# Altium PCB M26_T_V1.0.1.PcbDoc
Units mm, origin at the board's own origin, x right, y up, seen from the top; angles counter-clockwise.
Board outline 152.4 x 101.6 mm, 2 copper layers (Top Layer, Bottom Layer); 71 components, 71 nets, 276 pads, 47 vias.
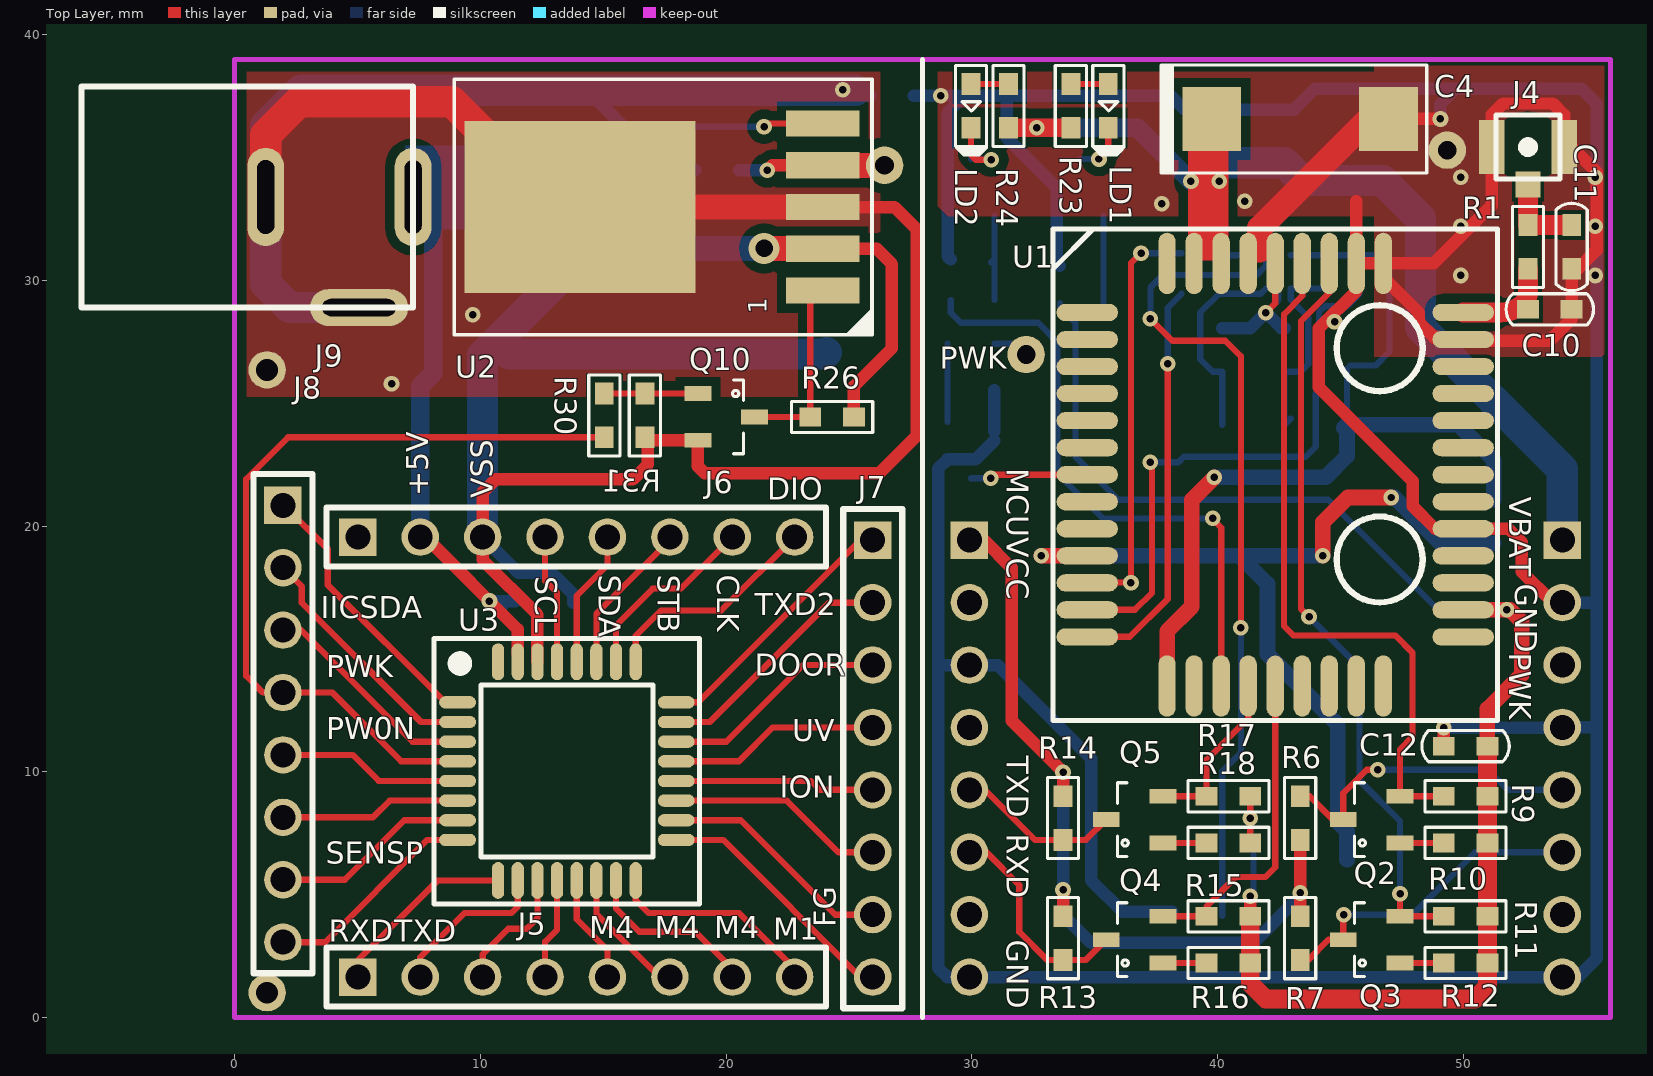
[diagram p0: Top Layer view]
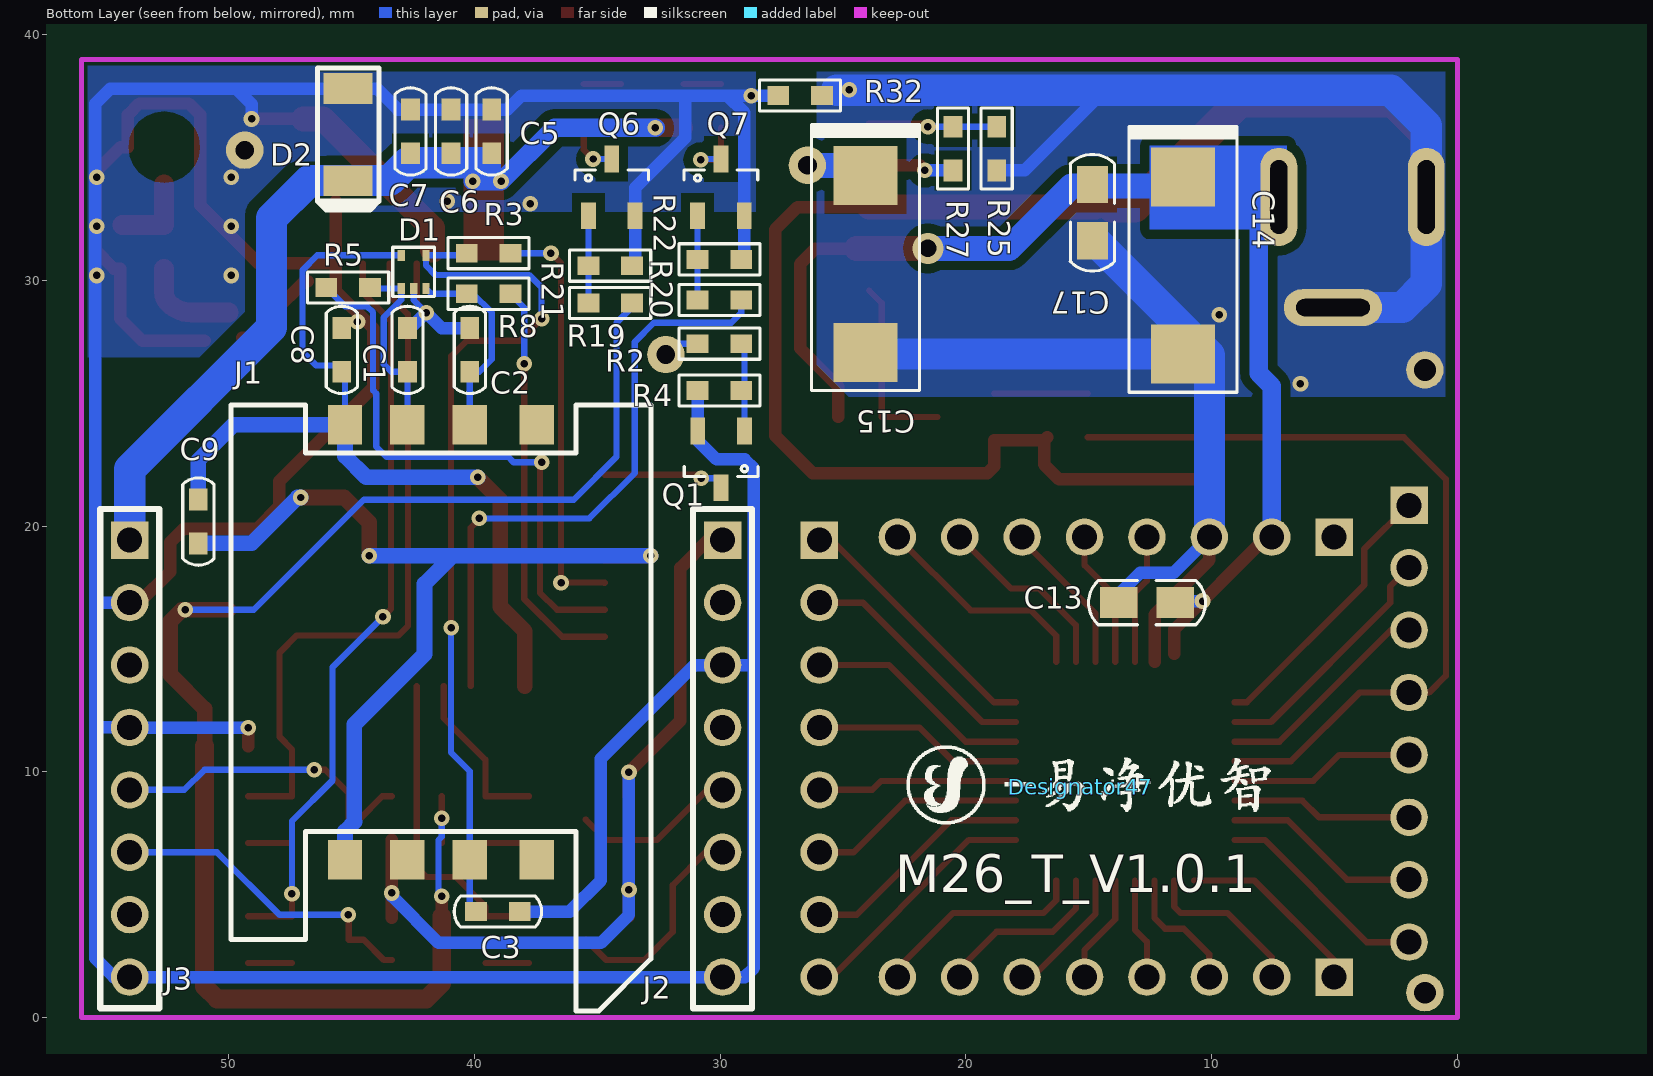
[diagram p1: Bottom Layer view, seen from below]

## Layer stack, top to bottom
Top Layer: signal copper 0.0356
Dielectric: dielectric 0.32, FR-4, Dk 4.8
Bottom Layer: signal copper 0.0356

## Board outline
-38.929,-36.83 113.471,-36.83 113.471,64.77 -38.929,64.77

## Design rules (kind name [scope] priority, off if disabled: settings)
Clearance [All] p1: gap=0.15
ComponentClearance [All] p1: gap=0.254 collisioncheckmode=3 verticalgap=0.254
PlaneClearance [All] p1: clearance=0.15
PlaneConnect [All] p1: planeconnectstyle=Relief reliefexpansion=0.508 reliefentries=4 reliefconductorwidth=0.508 reliefairgap=0.254
PolygonConnect [All] p1: connectstyle=Direct reliefconductorwidth=0.254 reliefentries=4 polygonreliefangle="90 Angle"
RoutingCorners [All] p1: cornerstyle=Round minsetback=10 maxsetback=10
RoutingVias [All] p1: holewidth=0.711 width=1.27 viastyle="Through Hole" minholewidth=0.305 minwidth=0.635 maxholewidth=1.27 maxwidth=1.27
SolderMaskExpansion [All] p1: expansion=0.102
TestPointUsage [All] p1: valid=0 allowmultiple=FALSE
Testpoint [All] p1: side=15 testpointundercomponent=TRUE minsize=1.016 maxsize=2.54 preferedsize=1.524 minholesize=0 maxholesize=1.016 preferedholesize=0.813 testpointgrid=0.025 style=1021 order=0123456789
Width [All] p1: maxlimit=2.54 minlimit=0.254 preferedwidth=0.254 minimp=50.000000 maximp=50.000000 favimp=50.000000
15 further rules are at their usual default settings.

## Classes and differential pairs
component class M26_T_V1.0: C1 C2 C3 C4 C5 C6 C7 C8 C9 C10 C11 C12 D1 D2 J1 J2 J3 J4 J? LD1 LD2 Q1 Q2 Q3 Q4 Q5 Q6 Q7 R1 R2 R3 R4 R5 R6 R7 R8 R9 R10 R11 R12 R13 R14 R15 R16 R17 R18 R19 R20 R21 R22 R23 R24 U1
component class M26_T_V1.0b: C13 C14 C15 C17 J5 J6 J7 J8 J9 Q10 R25 R26 R27 R30 R31 R32 U2 U3

## Components (designator, comment, footprint, x,y, rotation, side; value= is the part's Value field where it differs from the comment)
C1 "33PF" 0603_C 42.732,28.067 r270 bottom
C2 "33PF" 0603_C 40.192,28.067 r270 bottom
C3 "33PF" 0603_C 38.16,4.318 r0 bottom
C4 "470uF/16V" C_TAN_D 43.367,36.576 r0 top
C5 "0.1uF" 0603_C 39.303,36.957 r270 bottom
C6 "33P" 0603_C 40.954,36.957 r270 bottom
C7 "10P" 0603_C 42.605,36.957 r270 bottom
C8 "33PF" 0603_C 45.399,28.067 r270 bottom
C9 "0.1uF" 0603_C 51.241,21.082 r270 bottom
C10 "?" 0603_C 52.638,28.829 r0 top
C11 "?" 0603_C 54.416,32.258 r270 top
C12 "4.7uF" 0603_C 50.987,11.049 r180 top
C13 "0.1uF" 0805_C 13.776,16.891 r180 bottom
C14 "220uF/16V" C_TAN_D 11.169,30.607 r270 bottom
C15 "220uF/16V" C_TAN_D 24.085,30.673 r270 bottom
C17 "0.1uF" 0805_C 14.852,33.909 r270 bottom
D1 "ESDA6V8AV5" SOT-553 42.478,30.353 r90 bottom
D2 "BZV55C4V3" SOD-80 45.145,35.941 r270 bottom
Designator47 "Comment" PIC_AIRFACTORY-1500 15.351,9.398 r180 bottom
J1 "SIM_Card" SIM-8 45.272,24.13 r180 bottom
J2 "CON8" SIP-8 29.905,19.431 r270 bottom
J3 "CON8" SIP-8 54.035,19.431 r270 bottom
J4 "CON2" RF-Z 52.638,35.433 r0 top
J5 "CON8" SIP-8 5.013,1.651 r0 top
J6 "CON8" SIP-8 5.013,19.558 r0 top
J7 "CON8" SIP-8 25.968,19.431 r270 top
J8 "CON8" SIP-8 1.965,20.853 r270 top
J9 "POWER-5V" DC_5 1.263,33.401 r270 top
LD1 "WHITE" LED_0603 35.559,37.995 r270 top
LD2 "WHITE" LED_0603 29.971,37.995 r270 top
Q1 "2N3904" SOT23 29.016,23.876 r270 bottom
Q2 "BSS138" SOT23 47.431,7.112 r180 top
Q3 "BSS138" SOT23 47.431,2.225 r180 top
Q4 "BSS138" SOT23 37.779,2.225 r180 top
Q5 "BSS138" SOT23 37.779,7.112 r180 top
Q6 "2N3904" SOT23 35.366,32.639 r90 bottom
Q7 "2N3904" SOT23 30.921,32.639 r90 bottom
Q10 "2N3904" SOT23 18.856,25.4 r0 top
R1 "0R" 0603_R 52.638,30.48 r90 top
R2 "4.7K" 0603_R 30.921,27.432 r180 bottom
R3 "22R" 0603_R 40.319,31.115 r180 bottom
R4 "47K" 0603_R 29.143,25.527 r0 bottom
R5 "22R" 0603_R 44.256,29.718 r0 bottom
R6 "10K" 0603_R 43.367,7.234 r90 top
R7 "10K" 0603_R 43.367,4.125 r270 top
R8 "22R" 0603_R 40.319,29.464 r180 bottom
R9 "10K" 0603_R 50.987,9.012 r180 top
R10 "10K" 0603_R 50.987,7.112 r180 top
R11 "10K" 0603_R 50.987,4.125 r180 top
R12 "10K" 0603_R 50.987,2.225 r180 top
R13 "10K" 0603_R 33.715,4.125 r270 top
R14 "10K" 0603_R 33.715,9.012 r270 top
R15 "10K" 0603_R 41.335,4.125 r180 top
R16 "10K" 0603_R 41.335,2.225 r180 top
R17 "10K" 0603_R 41.335,9.012 r180 top
R18 "10K" 0603_R 41.335,7.112 r180 top
R19 "4.7K" 0603_R 33.588,29.083 r0 bottom
R20 "4.7K" 0603_R 29.143,29.21 r0 bottom
R21 "47K" 0603_R 35.366,30.607 r180 bottom
R22 "47K" 0603_R 30.921,30.861 r180 bottom
R23 "1K" 0603_R 34.035,36.217 r90 top
R24 "1K" 0603_R 31.495,36.217 r90 top
R25 "56K" 0603_R 18.751,36.261 r270 bottom
R26 "51K" 0603_R 25.206,24.45 r180 top
R27 "124K" 0603_R 20.529,36.261 r270 bottom
R30 "4.7K" 0603_R 15.046,23.622 r90 top
R31 "47K" 0603_R 16.697,25.4 r270 top
R32 "0R" 0603_R 25.863,37.531 r0 bottom
U1 "M26" M26 42.351,22.098 r0 top
U2 "MIC29302" TO-263-5 23.936,29.591 r90 top
U3 "OB39R32T1W32VP" LQFP32 13.522,10.033 r270 top

## Footprints (in the part's own frame and the unit in brackets; to place one, negate y for a bottom-side part, rotate by r counter-clockwise, add the part's x,y. Pads: shape width x height; smd on the part's side, far side on the other; paste and mask are expansions set on the pad)
0603_C [mil]
  rect 35x30 smd: 1(0,0) 2(70,0)
  silkscreen extent -35,-25 105,25, body extent 5,-15 65,15, height 39
0603_R [mil]
  rect 35x30 smd: 1(0,0) 2(70,0)
  silkscreen extent -30,-25 100,25, body extent 5,-15 65,15, height 39
0805_C [mil]
  rect 60x50 smd: 1(0,0) 2(90,0)
  silkscreen extent -48,-35 139,35
C_TAN_D [mm]
  rect 2.4x2.6 smd: 1(-3.6,0) 2(3.6,0)
  silkscreen extent -5.67,-2.2 5.15,2.2, body extent -3.67,-2.2 3.53,2.2, height 4.3
DC_5 [mm]
  oval 4x1.5 hole 0.7 slot 3 at 0 deg: 1(0,0) 3(0,6)
  oval 1.5x4 hole 0.7 slot 3 at 90 deg: 2(4.5,3.8)
  silkscreen extent -4.5,-7.5 4.5,6
LED_0603 [mil]
  rect 35x30 smd: A(0,0) K(70,0)
  silkscreen extent -30,-25 114,25
LQFP32 [mm]
  oval 0.5x1.5 smd: 1(-2.8,-4.45) 2(-2,-4.45) 3(-1.2,-4.45) 4(-0.4,-4.45) 5(0.4,-4.45) 6(1.2,-4.45) 7(2,-4.45) 8(2.8,-4.45) 17(2.8,4.45) 18(2,4.45) 19(1.2,4.45) 20(0.4,4.45) 21(-0.4,4.45) 22(-1.2,4.45) 23(-2,4.45) 24(-2.8,4.45)
  oval 1.5x0.5 smd: 9(4.45,-2.8) 10(4.45,-2) 11(4.45,-1.2) 12(4.45,-0.4) 13(4.45,0.4) 14(4.45,1.2) 15(4.45,2) 16(4.45,2.8) 25(-4.45,2.8) 26(-4.45,2) 27(-4.45,1.2) 28(-4.45,0.4) 29(-4.45,-0.4) 30(-4.45,-1.2) 31(-4.45,-2) 32(-4.45,-2.8)
  silkscreen extent -5.4,-5.4 5.4,5.4
M26 [mm]
  oval 2.5x0.7 smd: 1(-7.65,6.6) 2(-7.65,5.5) 3(-7.65,4.4) 4(-7.65,3.3) 5(-7.65,2.2) 6(-7.65,1.1) 7(-7.65,0) 8(-7.65,-1.1) 9(-7.65,-2.2) 10(-7.65,-3.3) 11(-7.65,-4.4) 12(-7.65,-5.5) 13(-7.65,-6.6) 23(7.65,-6.6) 24(7.65,-5.5) 25(7.65,-4.4) 26(7.65,-3.3) 27(7.65,-2.2) 28(7.65,-1.1) 29(7.65,0) 30(7.65,1.1) 31(7.65,2.2) 32(7.65,3.3) 33(7.65,4.4) 34(7.65,5.5) 35(7.65,6.6)
  oval 0.7x2.5 smd: 14(-4.4,-8.6) 15(-3.3,-8.6) 16(-2.2,-8.6) 17(-1.1,-8.6) 18(0,-8.611) 19(1.1,-8.6) 20(2.2,-8.6) 21(3.3,-8.6) 22(4.4,-8.6) 36(4.4,8.6) 37(3.3,8.6) 38(2.2,8.6) 39(1.1,8.6) 40(0,8.6) 41(-1.1,8.6) 42(-2.2,8.6) 43(-3.3,8.6) 44(-4.4,8.6)
  silkscreen extent -9.05,-10 9.05,10
PIC_AIRFACTORY-1500 [mm]
  silkscreen extent -7.06,-1.52 7.75,1.65
RF-Z [mm]
  rect 1x1.05 smd: 1(0,-1.525)
  rect 1.05x2.2 smd: 2(-1.475,0) 2(1.475,0)
  silkscreen extent -1.3,-1.3 1.3,1.3
SIM-8 [mm]
  rect 1.4x1.6 smd: 1(0,0) 2(2.54,0) 3(5.08,0) 4(7.8,0) 5(0,-17.7) 6(2.54,-17.7) 7(5.08,-17.7) 8(7.8,-17.7)
  silkscreen extent -4.65,-23.85 12.45,0.8
SIP-8 [mil]
  rect 60x60 hole 40: 1(0,0)
  round 60 hole 40: 2(100,0) 3(200,0) 4(300,0) 5(400,0) 6(500,0) 7(600,0) 8(700,0)
  silkscreen extent -50,-47 750,47
SOD-80 [mm]
  rect 1.25x2 smd: 1(-1.875,0) 2(1.875,0)
  silkscreen extent -2.7,-1.25 3.08,1.25
SOT23 [mm]
  rect 1.092x0.6 smd: 1(0,0) 2(0,-1.9) 3(2.308,-0.95)
  silkscreen extent 1.41,-2.45 1.85,0.55, body extent 0.45,-2.45 1.85,0.55, height 1.1
SOT-553 [mm]
  rect 0.45x0.3 smd: 1(-0.675,0.5) 2(-0.675,0) 3(-0.675,-0.5) 4(0.675,-0.5) 5(0.675,0.5)
  silkscreen extent -1,-0.85 1,0.85
TO-263-5 [mm]
  rect 1.07x3 smd: 1(0,0) 2(1.7,0) 3(3.4,0) 4(5.1,0) 5(6.8,0)
  rect 7x9.4 smd: 6(3.41,9.878)
  silkscreen extent -1.8,-2 8.6,15, body extent 0,0 6.8,12.6, height 4.5

## Part data
C1 C2 C3 C8 C9 C10 C11 C12 C17: library part CAP, "CAP"
C4 C14 C15: library part ECAP, "E-CAP"
C5 C6 C7 C13: library part "Cap Semi", "Capacitor"
D2: library part "DIODE SCHOTTKY"
LD1 LD2: library part LED, "LED"
Q1 Q6 Q7 Q10: library part NPN
Q2 Q3 Q4 Q5: library part "N-Channel Enhancement MOSFET", "N-Channel Enhancement MOSFET"
R1 R6 R7 R9 R10 R11 R12 R13 R14 R15 R16 R17 R18: library part Res3_3, "Resistor"
R2 R4 R19 R20 R21 R22 R23 R24 R30 R31 R32: library part RES1
R3 R5 R8 R25 R26 R27: library part R0.25W, "RESISTOR"

## Free pads (board coordinates)
  round 1.524 hole 0.889: 0(1.321,1.016) 0(1.321,26.365)
  round 1.524 hole 0.762: 0(26.452,34.691) 0(32.213,26.99) 0(49.352,35.306)

## Via types
v1: diameter 0.635, hole 0.305, Top Layer to Bottom Layer, tented both sides, 46 vias
v2: diameter 1.27, hole 0.711, Top Layer to Bottom Layer, tented both sides, 1 vias

## Nets (pads, with @x,y where several pads share a name; then routed paths per layer and width w, separated by ;. In a path a pad name is that pad's centre, name@x,y a point inside that pad or via, vN(x,y) a via of type N, cw(c..) or ccw(c..) an arc to the next point about the centre after c; other vN are vias at no path point)
+4V: C15.1 pad.0@26.452,34.691 R27.2 U2.4 | length 7.2
  Top Layer w0.508: v1@21.88,34.691 U2.4
  Top Layer w1.016: U2.4 pad.0@26.452,34.691
  Bottom Layer w0.508: R27.2 v1(21.672,34.483)
  Bottom Layer w1.016: C15.1@24.928,34.691 pad.0@26.452,34.691
+5V: C13.2 C14.1 C17.1 J6.2 J9.3 R26.1 U2.2 U3.31 | length 44.9
  Top Layer w0.508: J6.2 7.768,19.558 11.522,15.804 U3.31@11.522,14.808 ; U2.2 26.134,31.291 26.752,30.673 26.752,27.244 25.206,25.698 R26.1
  Top Layer w1.016: v2(21.545,31.308) U2.2@24.449,31.308
  Bottom Layer w0.254: C13.2@10.877,16.83 C13.2@11.004,16.703 ; C13.2@11.425,16.956 C13.2
  Bottom Layer w0.508: v1(10.37,16.956) C13.2@11.425,16.956
  Bottom Layer w0.762: J6.2 7.553,25.698 8.083,26.228 8.083,32.07
  Bottom Layer w1.016: C14.1@11.131,33.848 15.703,33.848 18.243,31.308 v2(21.545,31.308)
CLK: J6.7 U3.26 | length 7.8
  Top Layer w0.254: U3.26 15.522,15.97 17.017,17.465 18.16,17.465 J6.7 ; J6.7@19.872,19.558 J6.7@19.999,19.558
DBG_RX: Q3.2 R11.2 U1.38 | length 30.5
  Top Layer w0.254: v1(43.726,16.317) 43.397,16.646 43.397,28.346 44.551,29.5 U1.38 ; v1(47.431,5.036) Q3.2 R11.2
  Bottom Layer w0.254: v1(43.726,16.317) 45.78,14.263 45.78,9.652 47.431,8.001 v1(47.431,5.036)
DBG_TX: Q2.2 R9.2 U1.39 | length 28.6
  Top Layer w0.254: U1.39 43.451,29.377 42.71,28.636 42.71,15.936 43.091,15.555 47.238,15.555 47.939,14.854 47.939,11.425 47.431,10.917 Q2.2 R9.2
DIO: J6.8 U3.25 | length 9.2
  Top Layer w0.254: U3.25 16.322,15.544 17.354,16.576 19.811,16.576 J6.8
FG: J7.7 U3.18 | length 9.6
  Top Layer w0.254: U3.18 20.602,8.033 24.444,4.191 J7.7
GND: C1.1 C2.1 C3.1 C4.2 C5.1 C6.1 C7.1 C8.1 C10.2 C11.2 C12.2 D1.2 D2.1 J2.3 J2.8 J3.2 J3.4 J3.8 J4.2 pad.0@49.352,35.306 Q1.2 Q6.2 Q7.2 R4.2 R21.2 R22.2 R32.2 U1.27 U1.34 U1.36 U1.37 U1.40 U1.41 | length 226.8
  Top Layer w0.254: v1(41.97,28.697) 42.351,29.078 U1.40
  Top Layer w0.508: U1.37 48.797,30.698 51.163,33.064 51.163,35.433 51.163,36.747 51.622,37.206 53.654,37.206 54.113,36.747 54.113,35.433 54.411,35.433 55.432,34.412 55.432,31.237 54.675,30.48 C11.2 C10.2 54.416,28.443 53.527,27.554 U1.34@50.987,27.554 ; 45.651,33.221 45.651,29.584 44.129,28.062 44.129,25.649 47.939,21.839 47.939,20.823 48.864,19.898 51.84,19.898 52.384,19.354 52.384,18.156 53.649,16.891 J3.2 ; U1.36@46.796,29.967 46.923,29.967 48.193,28.697 48.193,28.316 48.828,27.681 U1.34@49.463,27.681 ; C4.2 v1(49.077,36.576) v1@49.082,36.571 ; C12.2 v1(49.209,11.806)
  Top Layer w1.016: 41.716,31.242 41.716,32.131 46.161,36.576 C4.2
  Bottom Layer w0.254: v1(41.97,28.697) 42.478,29.205 D1.2
  Bottom Layer w0.508: R32.2 38.089,37.531 38.663,36.957 C7.1 43.118,36.957 43.977,37.816 D2.1 54.822,37.816 55.432,37.206 55.432,2.408 54.675,1.651 29.011,1.651 28.635,2.027 28.635,22.347 29.011,22.723 30.149,22.723 Q1.2@30.916,23.49 ; 28.635,14.351 31.048,14.351 34.858,10.541 34.858,5.588 36.128,4.318 C3.1 ; R22.2 29.021,30.983 29.021,36.83 29.722,37.531 ; Q1.2 30.921,23.881 R4.2 ; 31.429,37.531 31.429,35.809 33.466,33.772 33.466,30.729 R21.2 ; C2.1 41.34,28.067 v1(41.97,28.697) 42.6,28.067 C1.1 ; v1(49.077,36.576) 49.077,37.176 49.717,37.816 ; v1(49.209,11.806) 54.03,11.806 J3.4 55.31,11.811 ; J3.2 55.31,16.891
  other v1: 44.764,28.321 49.895,30.207 55.381,30.207 49.895,32.207 55.381,32.207 37.728,33.122 41.106,33.223 49.895,34.207 55.381,34.207 28.737,37.516
IIC_SCL: J8.1 U3.1 | length 11.3
  Top Layer w0.254: J8.1 2.007,20.853 3.786,19.074 3.786,17.61 8.563,12.833 U3.1
IIC_SDA: J8.2 U3.2 | length 10.1
  Top Layer w0.254: J8.2 2.727,17.551 2.727,16.891 7.585,12.033 U3.2
ION: J7.5 U3.20 | length 8.1
  Top Layer w0.254: U3.20 23.447,9.633 23.809,9.271 J7.5
M26_RXD: Q5.2 R17.2 U1.17 | length 7
  Top Layer w0.254: Q5.2 R17.2 39.557,10.497 41.251,12.191 U1.17
M26_TXD: Q4.2 R15.2 U1.18 | length 13
  Top Layer w0.254: Q4.2 R15.2 39.557,4.528 40.755,5.726 41.959,5.726 42.351,6.118 U1.18
MCU_VCC: J2.1 R6.1 R7.1 R13.1 R14.1 | length 33.7
  Top Layer w0.508: J2.1@29.651,19.431 30.501,19.431 31.622,18.31 31.622,12.087 v1(33.715,9.994) R14.1 ; R13.1 v1@33.715,5.168 ; R7.1@43.367,4.059 R6.1
  Bottom Layer w0.508: v1(33.715,9.994) 33.715,4.186 34.858,3.043 41.462,3.043 43.367,4.948 v1(43.367,5.075)
  other v1: 33.715,5.202
MOT_1: J5.8 U3.16 | length 8.8
  Top Layer w0.254: U3.16 16.322,4.781 16.846,4.257 20.529,4.257 22.793,1.993 J5.8
MOT_2: J5.7 U3.15 | length 7.2
  Top Layer w0.254: U3.15 15.522,4.438 16.465,3.495 18.751,3.495 20.253,1.993 J5.7
MOT_3: J5.6 U3.14 | length 5.6
  Top Layer w0.254: U3.14 14.722,4.222 17.481,1.463 17.525,1.463 J5.6
MOT_4: J5.5 U3.13 | length 4.5
  Top Layer w0.254: U3.13 13.922,4.006 15.173,2.755 J5.5
NetC10_1: C10.1 R1.1 U1.35 | length 4
  Top Layer w0.8: U1.35 51.522,28.698 ccw(c51.522,30.012) 52.451,29.083 ccw(c52,29.534) 52.638,29.534 R1.1
NetC11_1: C11.1 J4.1 R1.2 | length 3.3
  Top Layer w0.8: J4.1 R1.2 C11.1@54.338,32.258
NetJ5_3: J5.3 U3.11 | length 5.3
  Top Layer w0.254: J5.3 10.093,2.584 11.131,3.622 11.893,3.622 12.322,4.051 U3.11
NetJ5_4: J5.4 U3.12 | length 4.1
  Top Layer w0.254: J5.4 12.633,3.092 13.122,3.581 U3.12
NetJ8_5: J8.5 U3.5 | length 7.5
  Top Layer w0.254: J8.5 4.801,10.693 5.861,9.633 U3.5
NetLD1_A: LD1.A R23.2 | length 1.5
  Top Layer w0.254: R23.2 LD1.A
NetLD1_K: LD1.K Q6.3 | length 2.2
  Top Layer w0.254: v1(35.178,34.947) 35.559,35.328 LD1.K
  Bottom Layer w0.254: Q6.3 v1(35.178,34.947)
NetLD2_A: LD2.A R24.2 | length 1.5
  Top Layer w0.254: LD2.A R24.2
NetLD2_K: LD2.K Q7.3 | length 3.6
  Top Layer w0.254: 29.971,35.455 LD2.K 29.971,35.108 30.159,34.92 v1(30.794,34.92)
  Bottom Layer w0.254: Q7.3 v1@30.767,34.947
NETLIGHT: R20.1 U1.16 | length 24.7
  Top Layer w0.254: v1(39.811,20.32) 39.811,20.279 40.151,19.939 U1.16
  Bottom Layer w0.254: R20.1 29.143,28.693 29.554,28.282 32.699,28.282 33.483,27.498 33.483,22.164 35.327,20.32 v1(39.811,20.32)
NetQ1_1: Q1.1 R2.2 R4.1 | length 3.2
  Bottom Layer w0.254: Q1.1@29.016,24.257 R2.2@29.016,27.432
NetQ1_3: Q1.3 U1.7 | length 4.8
  Top Layer w0.254: v1(30.772,21.949) 30.921,22.098 U1.7
  Bottom Layer w0.254: Q1.3@29.966,21.949 v1(30.772,21.949)
NetQ2_1: Q2.1 R10.2 | length 1.8
  Top Layer w0.254: Q2.1 R10.2
NetQ3_1: Q3.1 R12.2 | length 1.8
  Top Layer w0.254: Q3.1 R12.2
NetQ4_1: Q4.1 R16.2 | length 1.8
  Top Layer w0.254: Q4.1 R16.2
NetQ5_1: Q5.1 R18.2 | length 1.8
  Top Layer w0.254: Q5.1 R18.2
NetQ6_1: Q6.1 R19.2 R21.1 | length 3.6
  Bottom Layer w0.254: R19.2 Q6.1
NetQ7_1: Q7.1 R20.2 R22.1 | length 3.6
  Bottom Layer w0.254: R22.1@30.794,30.734 R22.1 ; R20.2 Q7.1
NetQ10_1: Q10.1 R30.2 R31.1 | length 3.8
  Top Layer w0.254: R30.2 Q10.1
NetQ10_3: Q10.3 R26.2 U2.1 | length 7.6
  Top Layer w0.254: Q10.3 R26.2 23.428,29.083 U2.1
NetR3_2: R3.2 U1.11 | length 17
  Top Layer w0.254: U1.11@34.717,17.698 U1.11 34.717,17.714 v1@36.463,17.714 ; v1(36.479,17.698) 36.479,30.704 v1(36.89,31.115)
  Bottom Layer w0.254: v1@36.614,17.698 v1@36.614,17.714 ; v1(36.89,31.115) R3.2
NetR5_2: R5.2 U1.12 | length 22.8
  Top Layer w0.254: U1.12 36.641,16.598 37.337,17.294 v1@37.337,22.733
  Bottom Layer w0.254: v1(37.271,22.606) 38.414,22.606 38.633,22.825 43.586,22.825 44.002,23.241 44.002,25.4 44.129,25.527 44.129,28.702 44.383,28.956 45.272,28.956 R5.2@45.78,29.464
NetR8_2: R8.2 U1.13 | length 16.6
  Top Layer w0.254: U1.13 36.43,15.498 37.972,17.04 v1(37.972,26.609)
  Bottom Layer w0.254: v1(37.972,26.609) 37.972,28.895 R8.2
NetR25_1: R25.1 R27.1 U2.5 | length 5.4
  Top Layer w0.254: v1@21.545,36.388 v1(21.545,36.261) 21.672,36.388 U2.5@23.958,36.388
  Bottom Layer w0.254: R25.1 v1(21.545,36.261)
PWK: J8.3 U3.3 | length 9
  Top Layer w0.254: J8.3 2.702,15.773 7.242,11.233 U3.3
PWRKEY: pad.0@32.213,26.99 R2.1 | length 1.5
  Bottom Layer w0.254: R2.1 31.771,27.432 pad.0@32.213,26.99
PWRON: J8.4 R30.1 U3.4 | length 33.3
  Top Layer w0.254: U3.4 6.772,10.433 3.972,13.233 1.149,13.233 0.463,13.919 0.463,21.91 2.175,23.622 R30.1
RXD: J5.1 U3.9 | length 7.7
  Top Layer w0.254: J5.1 5.013,2.33 8.266,5.583 U3.9
SCL: J6.4 U3.29 | length 5.3
  Top Layer w0.254: J6.4 12.633,17.78 13.122,17.291 U3.29
SDA: J6.5 U3.28 | length 5.6
  Top Layer w0.254: U3.28 13.922,17.164 15.173,18.415 J6.5
SENS_P: J8.6 U3.6 | length 7.4
  Top Layer w0.254: J8.6 5.629,8.153 6.309,8.833 U3.6
SIM_CLK: C2.2 D1.3 J1.3 R8.1 | length 8.2
  Bottom Layer w0.254: J1.3 C2.2 39.811,26.289 39.303,26.797 39.303,28.702 40.065,29.464 R8.1 41.764,29.464 D1.3
SIM_DATA: C3.2 D1.4 J1.7 R3.1 | length 35.9
  Top Layer w0.254: v1(37.271,28.448) 38.165,27.554 40.319,27.554 40.954,26.919 v1(40.954,15.87)
  Bottom Layer w0.254: v1(37.271,28.448) 37.271,29.718 37.779,30.226 41.589,30.226 41.978,30.615 D1.4 40.406,31.028 R3.1 ; C3.2@40.192,4.144 40.192,10.028 40.954,10.79 v1(40.954,15.87)
SIM_GND: C9.2 J1.5 U1.10 | length 37
  Top Layer w0.635: v1@32.828,18.798 U1.10 ; v1(44.286,18.798) 44.286,20.154 44.519,20.387 45.302,21.17 v1(47.08,21.17)
  Bottom Layer w0.635: v1@32.828,18.798 39.587,18.798 v1(44.286,18.798) ; 40.893,18.798 41.249,18.442 42.036,17.655 42.036,14.793 44.891,11.938 44.891,7.996 ; 44.874,7.979 45.272,7.581 J1.5 ; v1(47.08,21.17) 47.207,21.17 49.073,19.304 C9.2
  other v1: 32.826,18.796
SIM_RST: C1.2 D1.1 J1.2 R5.1 | length 8.3
  Bottom Layer w0.254: J1.2@42.986,24.384 J1.2 C1.2 43.392,26.289 43.697,26.594 43.697,28.499 42.978,29.218 D1.1 ; D1.1@42.986,29.67 D1.1 ; R5.1 44.216,29.678 D1.1
SIM_VDD: C8.2 C9.1 D1.5 J1.1 U1.14 | length 36.4
  Top Layer w0.635: U1.14 37.951,15.724 38.952,16.725 38.952,21.068 v1(39.877,21.993)
  Bottom Layer w0.254: D1.5 46.4,31.028 46.999,30.429 46.999,27.102 46.44,26.543 C8.2@45.399,26.543 ; J1.1 C8.2@45.272,26.416
  Bottom Layer w0.635: v1(39.877,21.993) 44.405,21.993 45.272,22.86 J1.1 ; J1.1@45.145,24.003 J1.1 ; C9.1 51.241,22.694 49.805,24.13 J1.1
SPK+: J8.8 U3.8 | length 8.8
  Top Layer w0.254: J8.8 3.683,3.073 7.843,7.233 U3.8
SPK-: J8.7 U3.7 | length 8.1
  Top Layer w0.254: J8.7 4.486,5.613 6.906,8.033 U3.7
STB: J6.6 U3.27 | length 6.2
  Top Layer w0.254: U3.27 14.722,16.44 17.459,19.177 J6.6@17.459,19.558
TXD: J5.2 U3.10 | length 6.7
  Top Layer w0.254: J5.2 7.553,2.457 9.353,4.257 11.258,4.257 11.522,4.521 U3.10
UART1_RXD: J3.5 Q2.3 R6.2 | length 12.9
  Top Layer w0.254: R6.2 43.753,9.012 44.703,8.062 Q2.3 45.123,9.139 46.078,10.094 v1(46.52,10.094)
  Bottom Layer w0.254: v1(46.52,10.094) 50.987,10.094 51.81,9.271 J3.5
UART1_TXD: J3.6 Q3.3 R7.2 | length 13.4
  Top Layer w0.254: R7.2 43.687,2.347 44.515,3.175 Q3.3 v1@45.123,4.169
  Bottom Layer w0.254: v1@45.145,4.186 47.939,4.186 50.484,6.731 J3.6@54.416,6.731
  other v1: 45.145,4.191
UART2_RXD: J7.1 U3.24 | length 10.7
  Top Layer w0.254: U3.24 18.862,12.833 25.46,19.431 J7.1
UART2_TXD: J7.2 U3.23 | length 10
  Top Layer w0.254: U3.23 19.332,12.033 24.19,16.891 J7.2
UART_RXD: J2.6 Q4.3 R13.2 | length 9.1
  Top Layer w0.254: J2.6@29.651,6.731 30.601,6.731 31.937,5.395 31.937,3.49 33.08,2.347 34.643,2.347 Q4.3
UART_TXD: J2.5 Q5.3 R14.2 | length 7
  Top Layer w0.254: J2.5@29.651,9.271 30.535,9.271 32.572,7.234 34.643,7.234 Q5.3
UV: J7.4 U3.21 | length 8.6
  Top Layer w0.254: U3.21 20.526,10.433 21.904,11.811 J7.4
UV电流检测: J7.6 U3.19 | length 8.9
  Top Layer w0.254: U3.19 22.469,8.833 24.571,6.731 J7.6
VBAT: C4.1 C5.2 C6.2 C7.2 D2.2 J3.1 R23.1 R24.1 U1.42 U1.43 | length 36.5
  Top Layer w0.762: R24.1 R23.1
  Bottom Layer w0.762: v1(32.638,36.217) 36.741,36.217 v1(38.922,34.036) v1(40.065,34.036)
  Bottom Layer w1.27: 39.557,34.29 39.557,34.798 42.732,34.798 43.464,34.066 46.731,34.066 48.26,32.537 48.26,28.092 54.035,22.317 J3.1
VDD_EXT: C12.1 R9.1 R10.1 R11.1 R12.1 R15.1 R16.1 R17.1 R18.1 R19.1 U1.24 | length 63.5
  Top Layer w0.254: R18.1 R17.1
  Top Layer w0.508: R15.1 v1(41.335,4.948)
  Top Layer w0.635: U1.24 51.91,16.598 52.384,16.124 52.384,13.965 50.987,12.568 C12.1
  Top Layer w0.762: R15.1 41.335,1.392 41.97,0.757 50.479,0.757 50.987,1.265 C12.1
  Bottom Layer w0.254: R19.1 33.588,28.917 34.223,28.282 34.223,22.821 35.962,21.082 44.501,21.082 48.985,16.598 v1(51.779,16.598) ; v1(41.335,4.948) 41.462,5.075 41.462,7.234 41.335,7.361 v1(41.335,8.123)
VSP: J7.8 U3.17 | length 10.3
  Top Layer w0.254: U3.17 19.878,7.233 25.46,1.651 J7.8
VSS: C13.1 C14.2 C15.2 C17.2 J6.3 J9.1 J9.2 pad.0@1.321,26.365 Q10.2 R25.2 R31.2 R32.1 U2.3 U2.6 U3.30 | length 157.3
  Top Layer w0.508: U3.30 12.322,16.401 10.093,18.63 J6.3 10.093,21.38 10.623,21.91 16.211,21.91 16.819,22.518 R31.2@16.819,23.5 ; R31.2 R31.2@16.819,23.5 ; U2.3@23.704,32.991 26.847,32.991 27.768,32.07 27.768,23.688 26.244,22.164 19.132,22.164 18.856,22.44 Q10.2 R31.2@16.819,23.5
  Top Layer w1.016: U2.6@14.719,32.991 U2.3
  Top Layer w1.27: J9.1 1.263,35.918 2.622,37.277 8.845,37.277 13.121,33.001 U2.6
  Bottom Layer w0.508: 2.495,37.531 14.56,37.531 17.608,34.483 R25.2 ; 10.093,23.031 J6.3 11.551,18.1 12.909,18.1 13.776,17.233 C13.1 ; R32.1@25.485,37.531 R32.1
  Bottom Layer w1.27: J9.2 2.235,28.901 1.263,29.873 1.263,36.299 2.708,37.744 25.272,37.744 ; J6.3 10.093,26.968 14.748,31.623 C17.2 ; C14.2 24.019,27.007 C15.2
  other v1: 6.385,25.806 9.687,28.6 24.749,37.77
仓门检测: J7.3 U3.22 | length 9.3
  Top Layer w0.254: U3.22 20.012,11.233 23.13,14.351 J7.3
pads on no net: J1.4 J1.6 J1.8 J2.2 J2.4 J2.7 J3.3 J3.7 J6.1 U1.1 U1.2 U1.3 U1.4 U1.5 U1.6 U1.8 U1.9 U1.15 U1.19 U1.20 U1.21 U1.22 U1.23 U1.25 U1.26 U1.28 U1.29 U1.30 U1.31 U1.32 U1.33 U1.44 U3.32

## Polygon pours and split planes (outlines as drawn)
GND on Top Layer "Top Layer-No Net" (solid, remove dead copper, pour order 1000): 44.256,41.859 54.083,41.859 57.88,37.621 57.88,29.394 55.981,27.275 55.646,26.901 46.378,26.901 46.378,40.613 47.829,42.233
VSS on Top Layer "Top Layer-No Net 1" (solid, remove dead copper, pour order 1001): -3.725,41.992 -3.725,25.798 -3.293,25.273 26.273,25.273 26.273,39.273 26.019,39.582 25.13,40.663 -1.82,40.663
GND on Top Layer "Top Layer-No Net 2" (solid, remove dead copper, pour order 1002): 28.61,39.522 28.61,33.02 28.711,32.918 29.016,32.614 48.447,32.614 48.447,39.827 47.99,40.284 47.609,39.903 30.464,39.903
GND on Bottom Layer "Top Layer-No Net" (solid, remove dead copper, pour order 1003): 43.905,41.55 55.081,41.55 59.399,37.391 59.399,29.319 57.24,27.24 56.859,26.873 46.318,26.873 46.318,40.327 47.969,41.917
GND on Bottom Layer "Bottom Layer-No Net" (solid, remove dead copper, pour order 1004): 28.229,39.878 45.401,39.878 46.491,38.71 46.609,38.583 46.609,32.791 28.56,32.791 28.56,39.751 28.797,40.005
VSS on Bottom Layer "Bottom Layer-No Net 1" (solid, remove dead copper, pour order 1005): -1.007,40.183 -1.007,26.416 0.136,25.273 24.596,25.273 24.774,25.273 25.816,26.314 26.07,26.568 26.07,39 26.07,43.688 22.945,46.812 4.81,46.812 -0.245,41.758

## Keep-outs
Keep-Out Layer:
  lines w0.203: 0,0 56,0 56,39 0,39 0,0

## Other copper
Top Layer:
  rectangle net VBAT: 38.795,30.825 40.446,36.576
Bottom Layer:
  rectangle net +5V: 6.94,32.07 12.528,35.499

## Silkscreen, mask and mechanical layers (free items; w line width, h text height)
Top Overlay:
  lines w0.203: 28,0 28,39
  text "PWK" at 28.702,26.416 h0.89
  text "MCUVCC" at 31.429,22.352 h0.89 r270
  text "+5V" at 7.88,21.224 h0.89 r90
  text "VBAT" at 51.876,21.209 h0.89 r270
  text "VSS" at 10.496,21.148 h0.89 r90
  text "DIO" at 21.672,21.082 h0.89
  text "SDA" at 14.814,18.034 h0.89 r270
  text "STB" at 17.227,18.034 h0.89 r270
  text "CLK" at 19.64,18.034 h0.89 r270
  text "SCL" at 12.243,17.958 h0.89 r270
  text "GND" at 52.13,17.653 h0.89 r270
  text "TXD2" at 21.164,16.383 h0.89
  text "IICSDA" at 3.511,16.256 h0.89
  text "PWK" at 51.876,14.859 h0.89 r270
  text "DOOR" at 21.164,13.909 h0.89
  text "PWK" at 3.729,13.862 h0.89
  text "PW0N" at 3.729,11.322 h0.89
  text "UV" at 22.688,11.242 h0.89
  text "TXD" at 31.429,10.668 h0.89 r270
  text "ION" at 22.18,8.956 h0.89
  text "RXD" at 31.429,7.493 h0.89 r270
  text "SENSP" at 3.704,6.267 h0.89
  text "FG" at 24.466,3.683 h0.89 r90
  text "M4" at 14.433,3.241 h0.89
  text "M4" at 17.1,3.241 h0.89
  text "M4" at 19.513,3.241 h0.89
  text "M1" at 21.926,3.175 h0.89
  text "GND" at 31.429,3.175 h0.89 r270
  text "RXD" at 3.831,3.092 h0.89
  text "TXD" at 6.498,3.092 h0.89
Bottom Overlay:
  text "M26_T_V1.0.1" at 22.869,5.105 h1.52
Mechanical 1:
  lines w0.203: 0,0 0,39 56,39 56,0 0,0

## Text inside footprints (layer, text, board x,y; h text height)
U2: Top Overlay "1" at 21.657,28.639 h0.76 r90